# Allegro board DACONVERTOR.brd
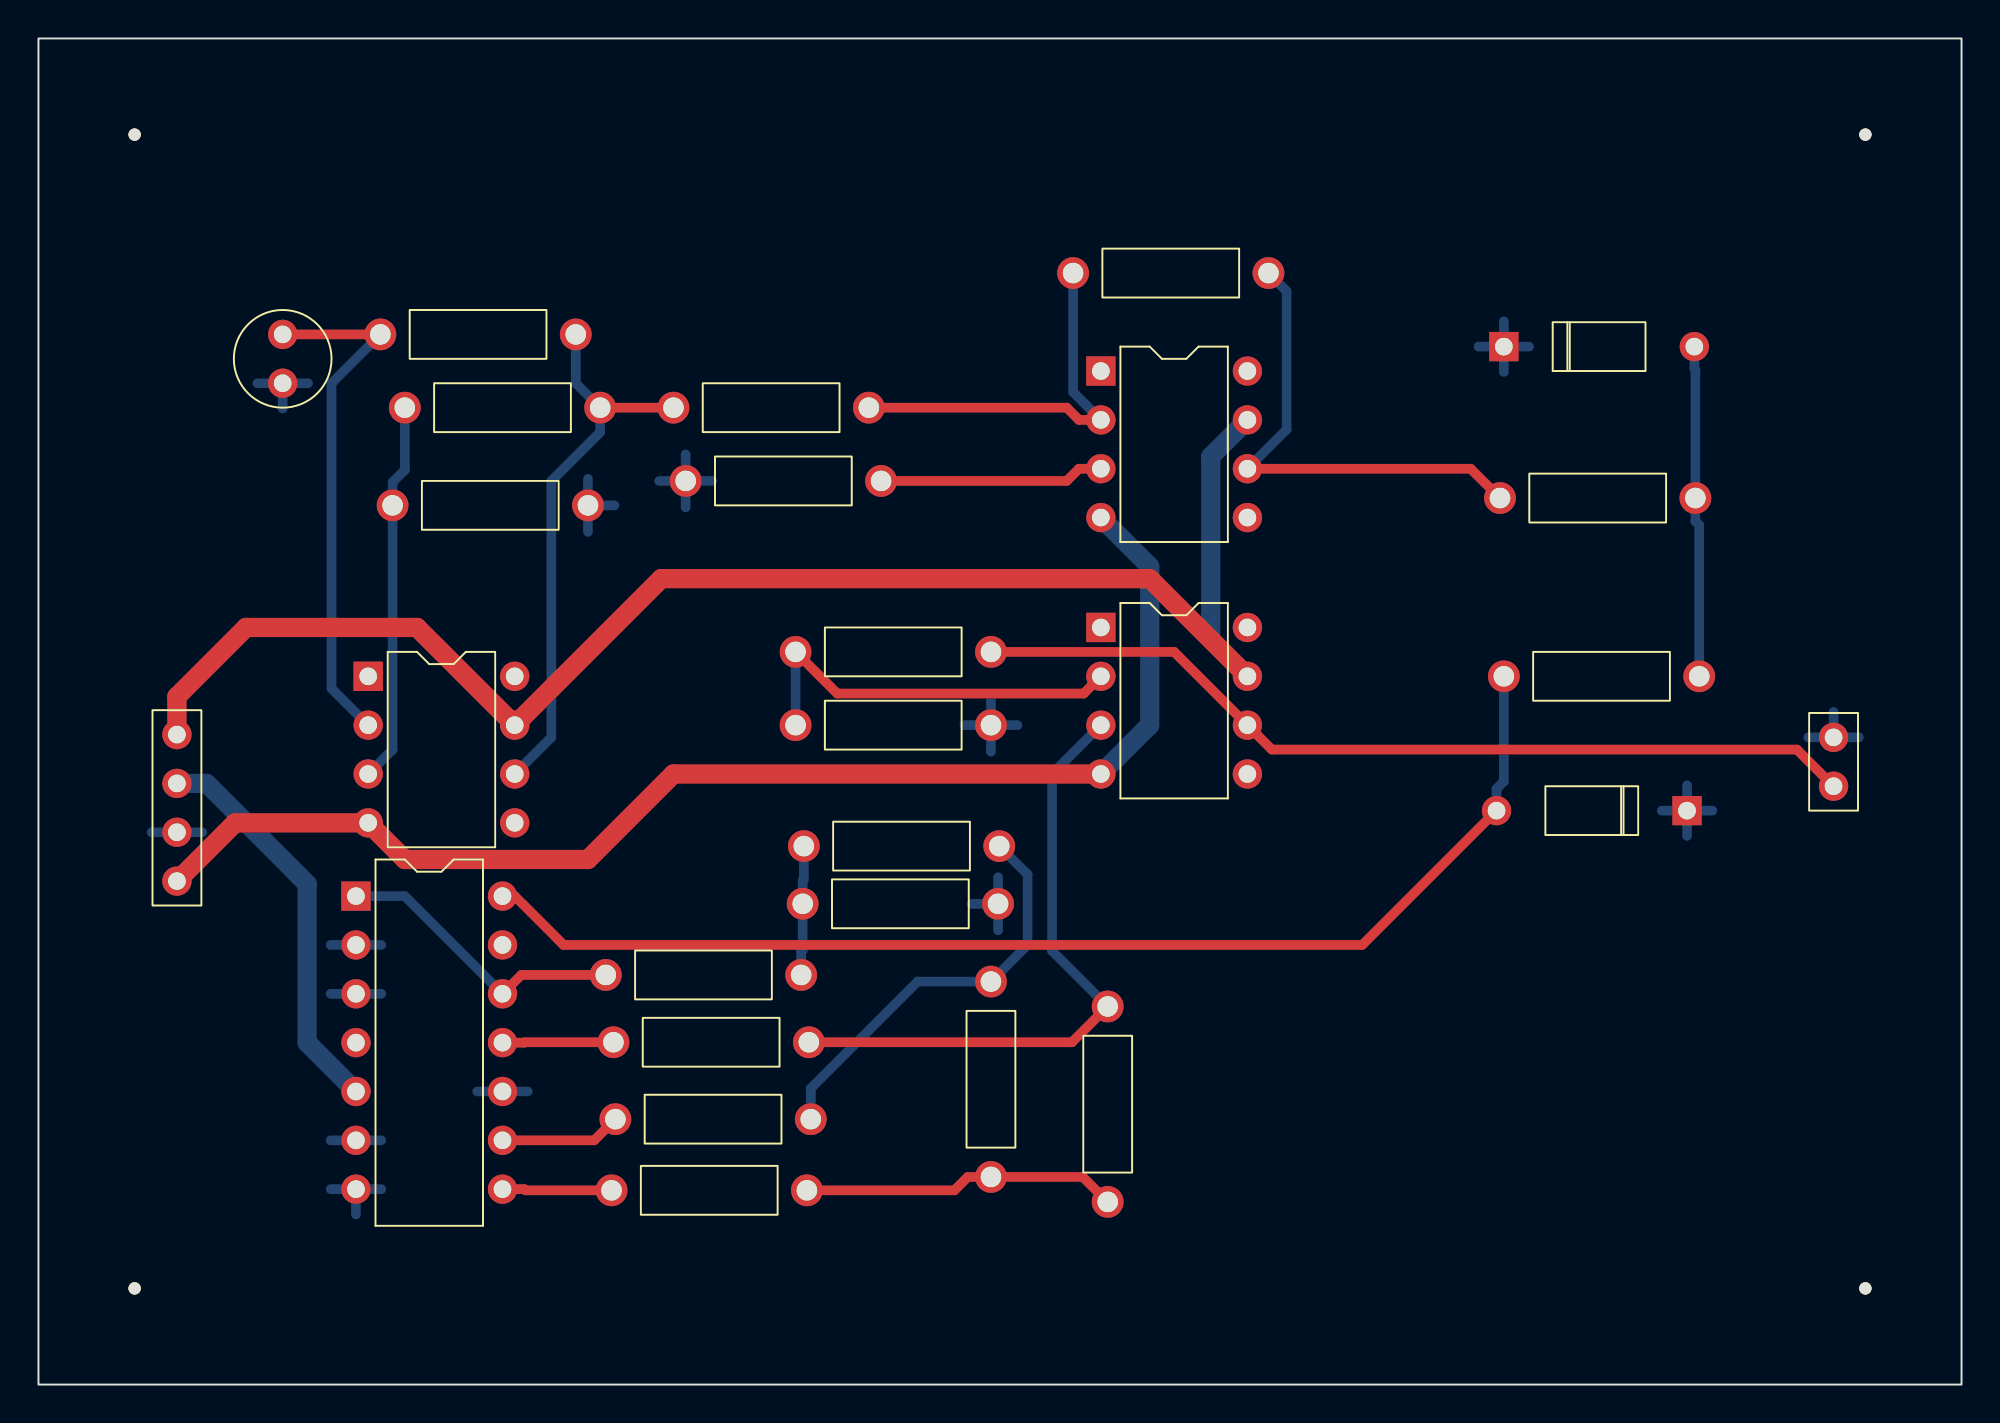
[diagram p0: board, top side]
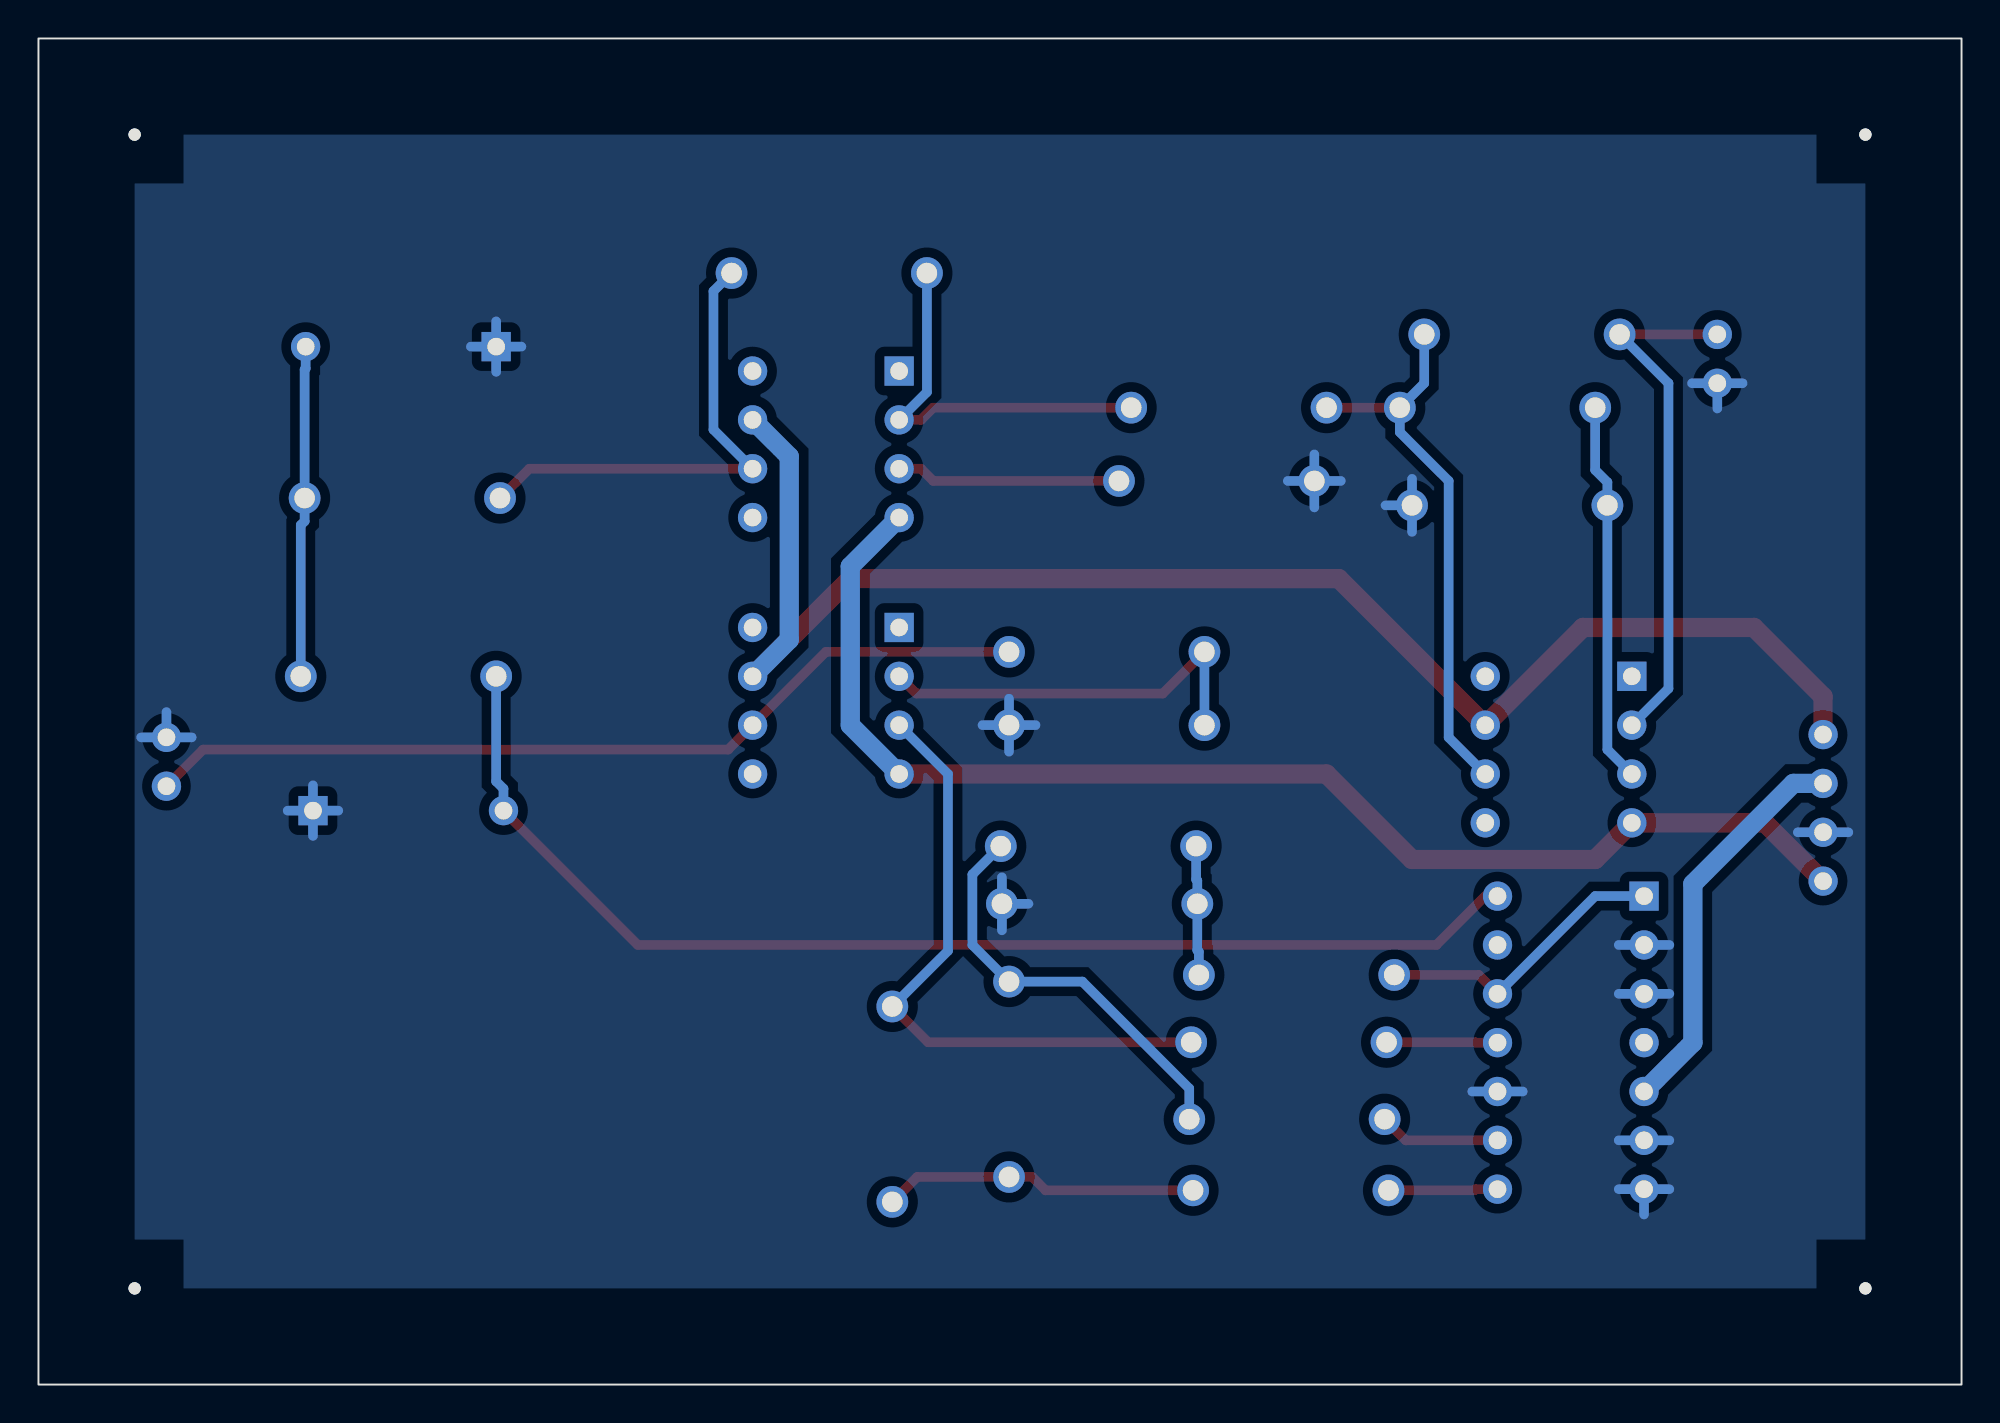
[diagram p1: board, bottom side, seen from below]

Outline 100 x 70 mm; copper layers: TOP, BOTTOM. Coordinates in mm from the lower left corner of the outline.
Outline path: rectangle 0,0 100,70

## Design rules (mm)
constraint set DEFAULT: min track width 0.5, pair gap 0.5

## Placement (name value [footprint] x y rotation side)
C1  0.1uF  [CAP196]  12.7 52.07 0 top
D1  1N4148  [DO41]  76.2 53.98 270 top
D2  RD 5.6A  [DO41]  85.72 29.84 90 top
J1  CON2  [JUMPER2]  93.34 31.11 90 top
J2  CON4  [JUMPER4]  7.2 33.8 270 top
NOREF  -  [unnamed]  95 65 0 top
NOREF#2  -  [unnamed]  5 5 0 top
NOREF#3  -  [unnamed]  5 65 0 top
NOREF#4  -  [#2]  0 70 0 top
NOREF#5  -  [#2]  100 0 90 top
NOREF#6  -  [unnamed]  95 5 0 top
R1  10K  [RES400]  17.78 54.61 270 top
R2  5.1K  [RES400]  53.8 57.8 270 top
R3  10K  [RES400]  33.02 50.8 270 top
R4  1K  [RES400]  76 46.1 270 top
R5  1K  [RES400]  86.36 36.83 90 top
R6  10K  [RES400]  33.66 46.99 270 top
R7  6.8K  [RES400]  19.05 50.8 270 top
R8  1K  [RES400]  28.57 45.72 90 top
R9  22K  [RES400]  29.9 17.8 270 top
R10  22K  [RES400]  39.37 38.1 270 top
R11  10K  [RES400]  55.6 9.5 0 top
R12  22K  [RES400]  29.8 10.1 270 top
R13  10K  [RES400]  49.53 20.95 180 top
R14  22K  [RES400]  30 13.8 270 top
R15  10K  [RES400]  39.8 28 270 top
R16  10K  [RES400]  49.53 34.29 90 top
R17  22K  [RES400]  29.5 21.3 270 top
R18  10K  [RES400]  49.9 25 90 top
U1  LM741  [DIP8_3]  17.14 36.83 0 top
U2  LM741  [DIP8_3]  55.24 52.7 0 top
U3  74LS90  [DIP14_3]  16.51 25.4 0 top
U4  LM741  [DIP8_3]  55.24 39.37 0 top

## Library data of the parts
C1 = C: Tolerance: ***; User Part Number: ***
D1 = D10D1
D2 = RD100EB
J1 = CON2: User Part Number: ***
J2 = CON4: User Part Number: ***
R1-R18 = R: Tolerance: ***; User Part Number: ***
U1 U2 U4 = LM741_1: Tolerance: ***; User Part Number: ***
U3 = 74LS90_1: Tolerance: ***; User Part Number: ***

## Footprints (pads in the part's own frame, mm; a bottom-side part is the same pattern mirrored in y, then rotated)
CAP196
  round 1.524 hole 0.914: 1(0,0) 2(0,2.54)
DIP8_3
  rect 1.524x1.524 hole 0.914: 1(0,0)
  round 1.524 hole 0.914: 2(0,-2.54) 3(0,-5.08) 4(0,-7.62) 5(7.62,-7.62) 6(7.62,-5.08) 7(7.62,-2.54) 8(7.62,0)
DIP14_3
  rect 1.524x1.524 hole 0.914: 1(0,0)
  round 1.524 hole 0.914: 2(0,-2.54) 3(0,-5.08) 4(0,-7.62) 5(0,-10.16) 6(0,-12.7) 7(0,-15.24) 8(7.62,-15.24) 9(7.62,-12.7) 10(7.62,-10.16) 11(7.62,-7.62) 12(7.62,-5.08) 13(7.62,-2.54) 14(7.62,0)
DO41
  rect 1.524x1.524 hole 0.914: 1(0,0)
  round 1.524 hole 0.914: 2(0,9.906)
JUMPER2
  round 1.524 hole 0.914: 1(0,0) 2(2.54,0)
JUMPER4
  round 1.524 hole 0.914: 1(0,0) 2(2.54,0) 3(5.08,0) 4(7.62,0)
RES400
  round 1.651 hole 1.067: 1(0,0) 2(0,10.16)
unnamed
  round 0.635 hole 3.175 unplated: (0,0)

## Nets
+5V: J2.2 U3.5
+12V: J2.1 U1.7 U2.7 U4.7
-12V: J2.4 U1.4(V-) U2.4(V-) U4.4(V-)
GND: C1.1 D1.1 D2.1 J1.2 J2.3 R6.1 R8.1 R16.1 R18.1 U3.2 U3.3 U3.6 U3.7(R92) U3.10
CLK: D2.2 R5.2 U3.14
OUT: J1.1 R10.2 U4.6
SIG: R9.2 R11.2 U4.3
N00272: C1.2 R1.1 U1.2
N00279: R1.2 R3.1 R7.2 U1.6
N00306: R7.1 R8.2 U1.3
N00730: R6.2 U2.3
N00737: R2.1 R3.2 U2.2
N00754: R2.2 R4.1 U2.6
N00914: D1.2 R4.2 R5.1
N01548: R17.1 U3.1 U3.12
N01708: R12.1 U3.8
N01723: R9.1 U3.11
N01909: R11.1 R12.2 R13.2
N02056: R13.1 R14.2 R15.2
N02074: R15.1 R17.2 R18.2
N02502: R14.1 U3.9
N02735: R10.1 R16.2 U4.2

Pads without a net: U1 1 5 8; U2 1 5 8; U3 4 13; U4 1 5 8

## Routing (per net, layer and track width the routed paths; a pad name or vN(x,y) marks a point on that pad's centre or on a via; arc(x,y) is an arc through that point)
+5V: length 20.8
  BOTTOM w1: J2.2 8.74,31.26 13.97,26.03 13.97,17.78 U3.5
+12V: length 81.4
  TOP w1: J2.1 7.2,35.77 10.79,39.37 19.68,39.37 U1.7 32.38,41.91 57.78,41.91 U4.7
  BOTTOM w1: U2.7 60.96,48.26 60.96,38.73 U4.7
-12V: length 67.4
  TOP w1: U4.4 33.02,31.75 28.57,27.3 19.05,27.3 U1.4 10.23,29.21 J2.4
  BOTTOM w1: U4.4 57.78,34.29 57.78,42.55 U2.4
GND: length 54.8
  BOTTOM w0.5: 16.51,8.85 U3.7 ; U3.7 15.2,10.16 ; U3.7 17.82,10.16 ; 74.89,53.98 D1.1 ; D1.1 76.2,52.66 ; D1.1 76.2,55.29 ; D1.1 77.52,53.98 ; D2.1 87.04,29.84 ; D2.1 85.72,31.16 ; D2.1 85.72,28.53 ; D2.1 84.41,29.84 ; 33.66,45.61 R6.1 ; R6.1 33.66,48.37 ; R6.1 32.28,46.99 ; R6.1 35.03,46.99 ; 15.2,12.7 U3.6 17.82,12.7 ; 8.52,28.72 J2.3 5.88,28.72 ; R8.1 28.57,47.1 ; R8.1 28.57,44.34 ; R8.1 29.95,45.72 ; 49.53,32.91 R16.1 ; R16.1 49.53,35.67 ; R16.1 50.91,34.29 ; R16.1 48.15,34.29 ; 17.82,22.86 U3.2 15.2,22.86 ; J1.2 94.66,33.66 ; J1.2 92.03,33.66 ; J1.2 93.34,34.97 ; 11.38,52.07 C1.1 ; C1.1 12.7,50.76 ; C1.1 14.02,52.07 ; 22.82,15.24 U3.10 25.45,15.24 ; 48.52,25 R18.1 ; R18.1 49.9,23.62 ; R18.1 49.9,26.38 ; 15.2,20.32 U3.3 17.82,20.32
CLK: length 63.3
  TOP w0.5: 75.82,29.84 68.83,22.86 27.3,22.86 24.77,25.4 U3.14 23.62,25.4
  BOTTOM w0.5: 75.82,29.84 75.82,30.98 76.2,31.37 R5.2
OUT: length 46.7
  TOP w0.5: R10.2 59.05,38.1 U4.6 64.14,33.02 91.44,33.02 J1.1
SIG: length 33.2
  TOP w0.5: R9.2 53.74,17.8 R11.2
  BOTTOM w0.5: U4.3 52.7,31.75 52.7,22.55 R11.2
N00272: length 27.2
  TOP w0.5: C1.2 R1.1
  BOTTOM w0.5: U1.2 15.24,36.2 15.24,52.07 R1.1
N00279: length 29
  TOP w0.5: R3.1 R7.2
  BOTTOM w0.5: R1.2 27.94,52.07 R7.2 29.21,49.53 26.67,46.99 26.67,33.66 U1.6
N00306: length 19.8
  BOTTOM w0.5: U1.3 18.41,33.02 R8.2 18.41,46.92 19.05,47.56 R7.1
N00730: length 11.7
  TOP w0.5: R6.2 53.47,46.99 54.1,47.62 U2.3
N00737: length 20.6
  TOP w0.5: U2.2 54.1,50.16 53.47,50.8 R3.2
  BOTTOM w0.5: R2.1 53.8,51.61 U2.2
N00754: length 25.2
  TOP w0.5: U2.6 74.47,47.62 R4.1
  BOTTOM w0.5: U2.6 64.9,49.66 64.9,56.86 R2.2
N00914: length 17.3
  BOTTOM w0.5: D1.2 86.11,52.84 86.16,52.78 R4.2 86.16,44.9 86.36,44.7 R5.1
N01548: length 15.5
  TOP w0.5: U3.12 25.11,21.3 R17.1
  BOTTOM w0.5: U3.1 19.05,25.4 U3.12
N01708: length 5.7
  TOP w0.5: R12.1 25.33,10.1 25.27,10.16 U3.8
N01723: length 5.8
  TOP w0.5: U3.11 25.27,17.78 25.29,17.8 R9.1
N01909: length 16.5
  TOP w0.5: R12.2 47.63,10.1 48.33,10.79 54.3,10.79 R11.1
N02056: length 21.7
  BOTTOM w0.5: R15.2 51.44,26.52 51.44,22.86 R13.1 45.72,20.95 40.16,15.4 R14.2
N02074: length 6.8
  BOTTOM w0.5: R17.2 39.66,22.5 39.74,22.58 R18.2 39.74,26.2 39.8,26.26 R15.1
N02502: length 6.3
  TOP w0.5: U3.9 28.9,12.7 R14.1
N02735: length 21
  TOP w0.5: U4.2 54.35,35.93 41.54,35.93 R10.1
  BOTTOM w0.5: R10.1 R16.2

## Copper pours and planes (outline as drawn; the poured copper is in the pictures)
GND on BOTTOM: 5,5 5,65 95,65 95,5 ; 3 cut-outs

## Text on the board
User.Comments: ELECTRONIC CAD | DA CONVERTOR
DEVICE_TYPE_TOP: FIGURE | FINISHED_SIZE | 0.914 | 1.067 | 3.175 | DRILL CHART: TOP to BOTTOM | ALL UNITS ARE IN MILLIMETERS | PLATED | NON-PLATED | QTY | 50 | 36 | 4
